# Altium PCB PUMP_MODULE_20230110.PcbDoc (part 5 of 6)
Units mm, origin at the board's own origin, x right, y up, seen from the top; angles counter-clockwise.
Board outline 260.15 x 142.01 mm, 4 copper layers (Top Layer, Mid-Layer 1, Mid-Layer 2, Bottom Layer); 422 components, 240 nets, 1746 pads, 416 vias.
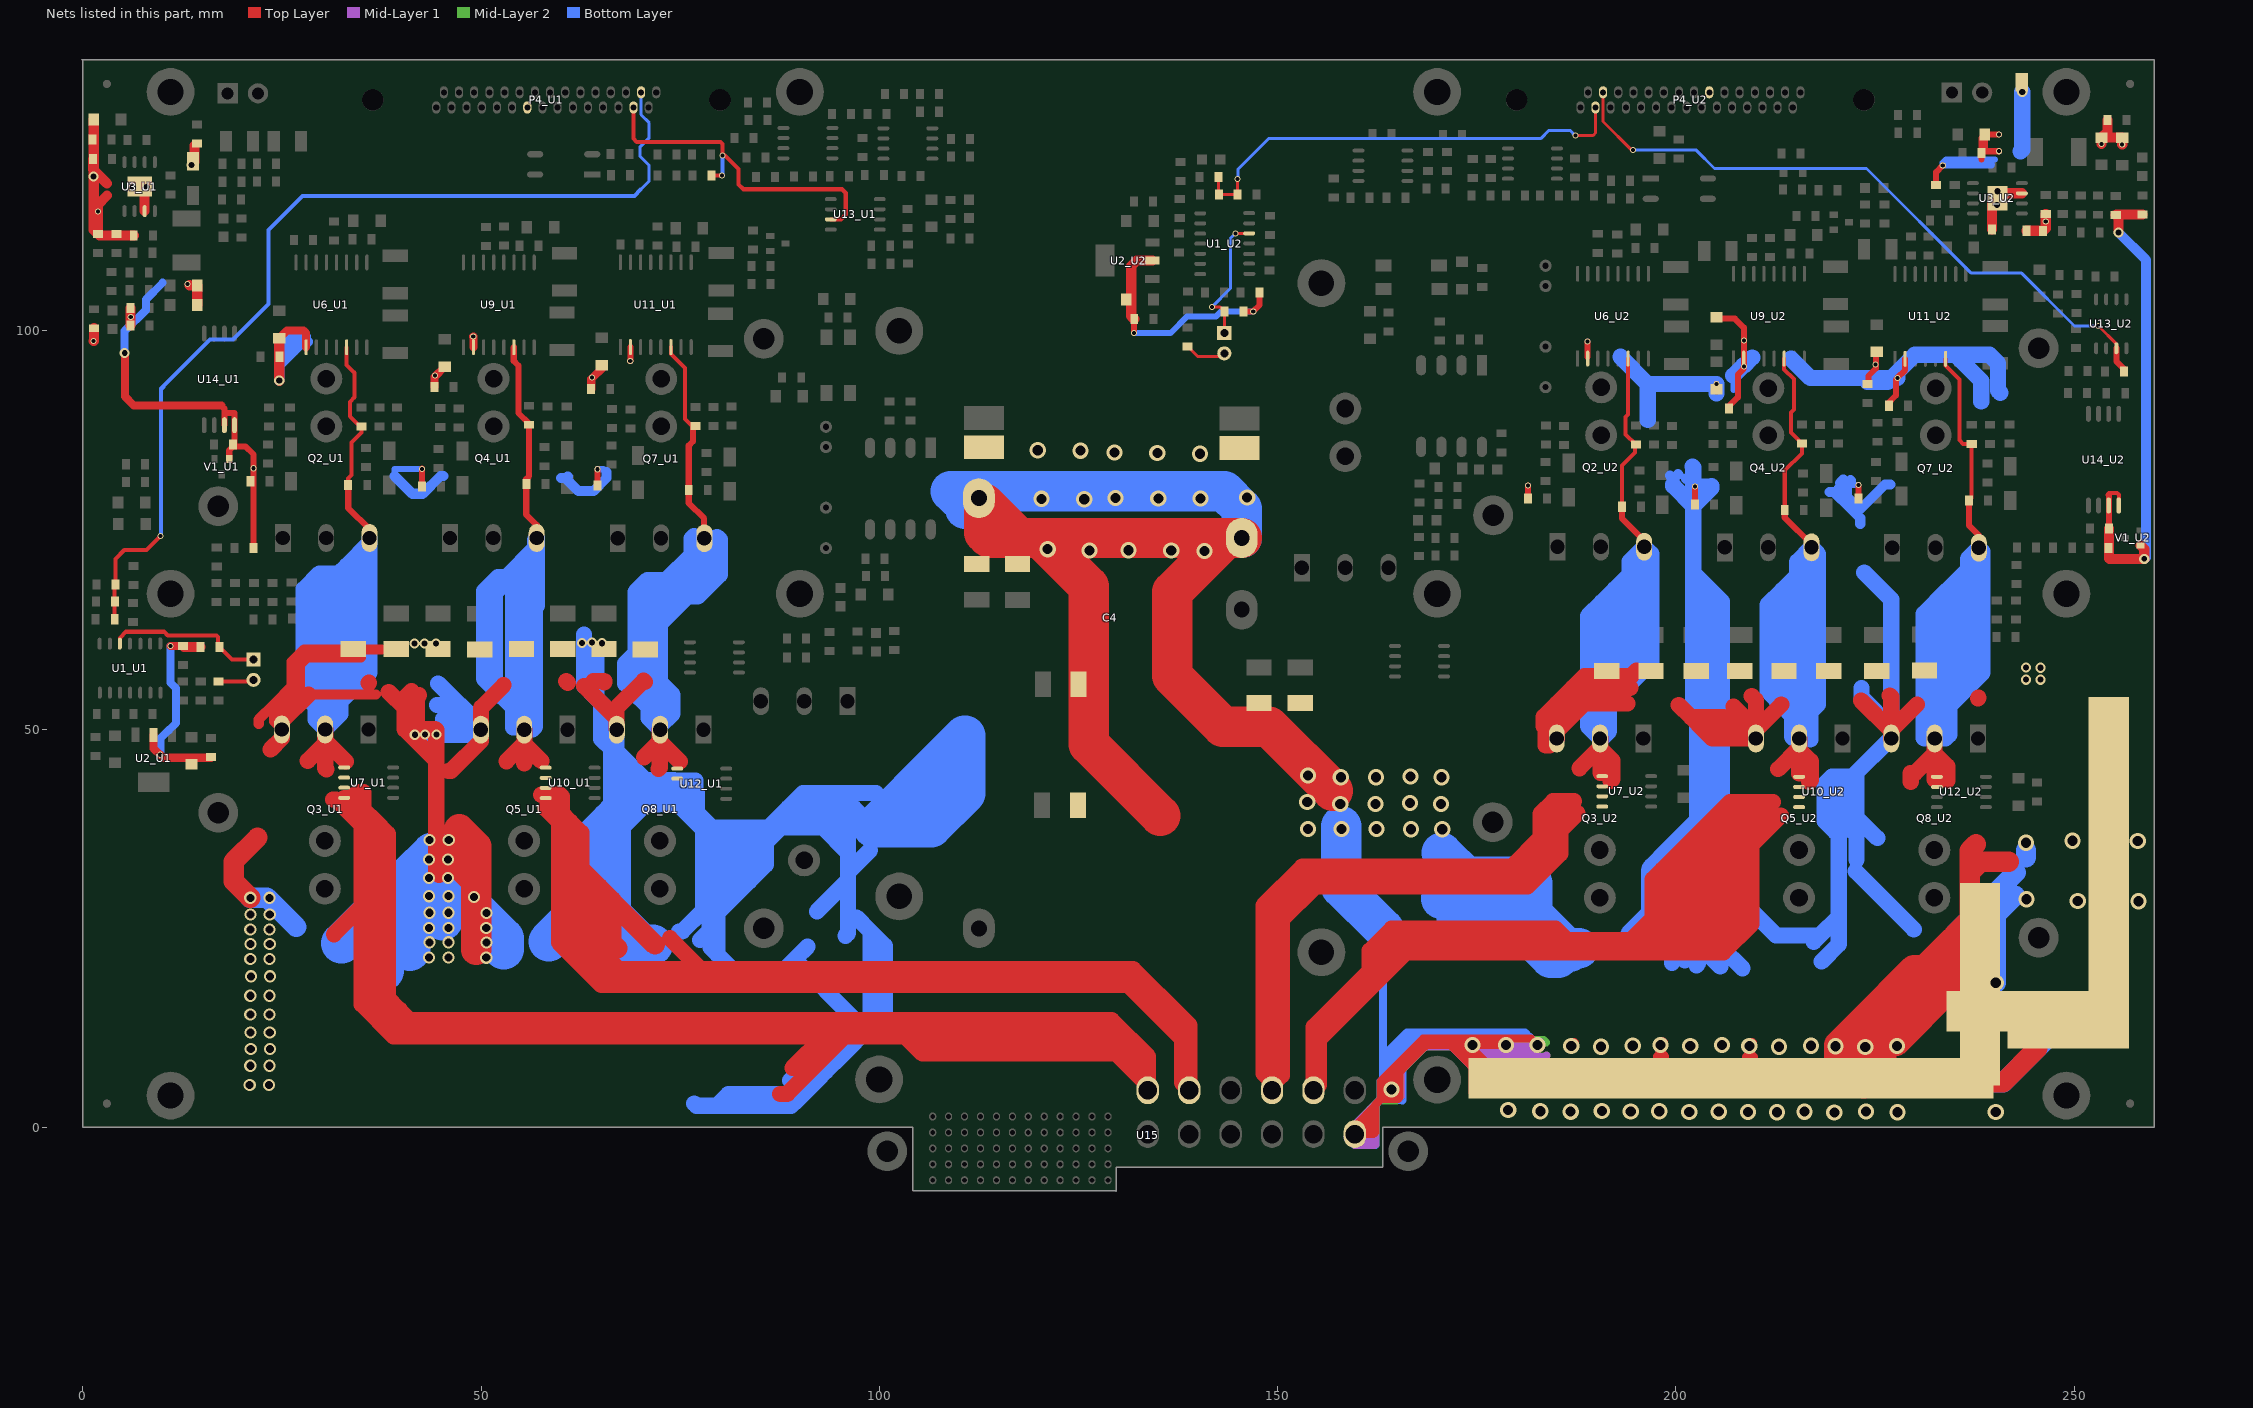
[diagram p7: the nets of this part, all layers, seen from the top]

## Via types
v1: diameter 0.762, hole 0.508, Top Layer to Bottom Layer, 208 vias
v2: diameter 2.032, hole 1.27, Top Layer to Bottom Layer, 78 vias
v3: diameter 1.27, hole 0.762, Top Layer to Bottom Layer, 61 vias
v4: diameter 1.524, hole 1.016, Top Layer to Bottom Layer, 53 vias
v5: diameter 1.27, hole 0.711, Top Layer to Bottom Layer, 16 vias

## Nets (pads, with @x,y where several pads share a name; then routed paths per layer and width w, separated by ;. In a path a pad name is that pad's centre, name@x,y a point inside that pad or via, vN(x,y) a via of type N, cw(c..) or ccw(c..) an arc to the next point about the centre after c; other vN are vias at no path point) (continued)
PGND: C4.2 C15_U1.1 C15_U2.1 C16_U1.1 C16_U2.1 C17.1 C18.1 C19_U1.2 C19_U2.2 C20_U1.1 C20_U2.1 C21_U1.2 C21_U2.2 C22_U1.2 C22_U2.2 C24_U1.2 C24_U2.2 C25_U1.1 C25_U2.1 C26_U1.1 C26_U2.1 C27_U1.1 C27_U2.1 C29_U1.1 C29_U2.1 C30_U1.1 C30_U2.1 C43_U1.2 C43_U2.2 C44_U1.2 C44_U2.2 C51_U1.2 C51_U2.2 C52_U1.2 C52_U2.2 C68_U1.2 C68_U2.2 C69_U1.1 C69_U2.1 C70_U1.1 C70_U2.1 C71_U1.1 C71_U2.1 C72_U1.1 C72_U2.1 C73.1 C74.1 C75.1 C76.1 C77_U1.1 C77_U2.1 C78_U1.1 C78_U2.1 D2_U1.1 D2_U2.1 pad.@186.665,6.172 pad.@210.414,6.172 pad.@227.203,6.172 pad.@238.176,17.958 pad.@244.145,14.58 pad.@249.276,12.446 pad.@254.356,24.765 pad.@254.356,41.326 Q3_U1.3 Q3_U2.3 Q5_U1.3 Q5_U2.3 Q8_U1.3 Q8_U2.3 R16_U1.2 R16_U2.2 R21_U1.2 R21_U2.2 R22_U1.1 R22_U2.1 R24_U1.2 R24_U2.2 R25_U1.1 R25_U2.1 R37_U1.1 R37_U2.1 R54_U1.1 R54_U2.1 R68_U1.1 R68_U2.1 R78_U1.2 R78_U2.2 U3_U1.7 U3_U1.9 U3_U2.7 U3_U2.9 U6_U1.2 U6_U2.2 U9_U1.2 U9_U2.2 U11_U1.2 U11_U2.2 U14_U1.3 U14_U1.4 U14_U2.3 U14_U2.4 U15.12 V1_U1.1 V1_U2.1 | length 2564
  Top Layer w0.508: C69_U2.1@254.305,72.72 C69_U2.1@254.33,72.746 ; U14_U2.3@254.33,78.08 254.33,79.375 254.229,79.477 254.381,79.629 255.397,79.629 255.6,79.426 U14_U2.4@255.6,78.08
  Top Layer w0.762: 17.399,90.627 17.78,90.246 17.78,89.433 ; U14_U1.3@17.78,88.163 17.78,89.433 ; V1_U1.1@18.39,83.896 18.39,84.988 C69_U1.1@18.898,85.496 ; R37_U1.1@21.057,81.128 R37_U1.1@21.438,80.747 ; R78_U1.2@21.438,72.746 R37_U1.1@21.438,80.747 ; 24.663,95.58 24.79,95.58 ; R54_U1.1@42.57,80.467 42.57,82.702 v1(42.596,82.677) ; v1(64.618,82.626) 64.618,82.677 64.643,82.652 R68_U1.1@64.643,80.569 ; v1(68.732,96.241) 68.758,96.266 U11_U1.2@68.758,97.968 ; R37_U2.1@181.407,78.943 v1(181.407,80.569) ; U6_U2.2@188.925,96.723 v1(188.925,98.654) ; R54_U2.1@202.387,78.181 v1(202.387,80.442) ; C43_U2.2@205.08,92.405 v1(205.08,93.32) ; C51_U2.2@205.08,101.702 205.232,101.549 207.391,101.549 208.534,100.406 v1(208.534,98.781) v1(208.534,95.529) 208.534,95.504 208.509,95.479 208.509,95.25 207.772,94.513 207.772,91.669 C44_U2.2@206.68,90.576 ; R68_U2.1@222.936,78.943 v1(222.936,80.67) ; C68_U2.2@224.18,93.751 224.18,94.361 225.12,95.301 C19_U2.2@225.12,97.358 ; C52_U2.2@226.644,90.907 227.635,91.897 227.635,93.904 v1(227.813,94.082) ; v1@227.8,94.094 228.778,95.072 U11_U2.2@228.778,96.495 ; R24_U2.2@232.664,118.313 232.664,119.939 v1(233.502,120.777) ; 238.379,121.539 C25_U2.1@238.379,122.352 ; v1(240.538,122.555) C25_U2.1@238.582,122.555 ; v1(240.538,124.638) C24_U2.2@238.785,124.638 ; 254.33,79.375 254.381,79.324 R78_U2.2@254.381,75.209 ; 17.78,89.433 18.059,89.713 19.025,89.713 19.05,89.687 U14_U1.4@19.05,88.163 19.05,85.649 C69_U1.1@18.898,85.496 ; C69_U1.1@18.898,85.496 20.422,85.496 21.438,84.48 R37_U1.1@21.438,80.747 ; C25_U2.1@238.379,122.352 C25_U2.1@238.582,122.555 ; C25_U2.1@238.379,122.352 238.379,124.231 C24_U2.2@238.785,124.638 ; C25_U2.1@238.582,122.555 238.785,122.758 C24_U2.2@238.785,124.638
  Top Layer w1.016: v5(5.258,97.231) 5.283,97.206 5.283,91.745 6.401,90.627 17.399,90.627 ; C43_U1.2@24.663,99.085 25.629,100.051 27.711,100.051 28.042,99.72 U6_U1.2@28.042,97.942 ; C44_U1.2@44.145,92.964 44.145,94.209 C51_U1.2@45.441,95.504 ; v1(49.022,99.314) 49.047,99.289 U9_U1.2@49.047,97.942 ; C52_U1.2@63.83,92.71 63.83,93.955 65.354,95.479 C19_U1.2@65.354,95.733 ; pad.@174.473,7.569 171.679,10.363 ; pad.@176.098,6.934 176.098,7.315 174.6,8.814 174.473,8.941 ; pad.@176.53,7.798 174.6,9.728 v2@174.473,9.855 ; v2@178.943,10.109 v2(178.689,10.363) v2(174.473,10.363) ; v2(182.626,10.363) 181.839,11.151 168.758,11.151 ; U15.12@159.741,-0.837 159.741,0.204 162.286,2.748 ; U15.12@159.741,-0.837 U15.12@160.934,-0.837 ; U15.12@159.741,-0.837 162.286,1.707 ; U15.12@160.934,-0.837 162.028,-0.837 162.286,-0.579 162.286,0.514 ; U15.12@160.934,-0.837 162.286,0.514 ; 162.286,0.514 162.286,1.707 ; 162.286,1.707 162.286,2.748 ; 162.286,2.748 162.286,2.894 162.973,3.581 ; 162.973,3.581 162.973,5.849 168.275,11.151 168.758,11.151 ; 162.973,3.581 163.373,3.981 163.373,5.766 164.313,6.706 ; 162.973,3.581 163.119,3.581 ; 163.119,3.581 165.1,3.581 165.303,3.785 165.303,6.96 ; 163.119,3.581 v2(164.313,4.775) 164.313,6.706 ; 164.313,6.706 165.303,7.696 ; 165.303,6.96 165.303,7.696 ; 165.303,6.96 168.707,10.363 ; 165.303,7.696 167.97,10.363 ; 167.97,10.363 168.707,10.363 ; 167.97,10.363 168.758,11.151 ; 168.707,10.363 171.679,10.363 ; 171.679,10.363 173.05,10.363 ; 173.05,10.363 174.473,8.941 ; 173.05,10.363 v2(174.473,10.363) ; 174.473,8.941 v2@174.473,9.855 ; v2@174.473,9.855 v2(174.473,10.363)
  Top Layer w1.27: C26_U1.1@1.295,121.59 1.295,120.244 1.372,120.167 ; v1(1.372,98.73) 1.422,98.781 R16_U1.2@1.422,100.33 ; C24_U1.2@1.372,126.517 1.372,120.167 ; 3.023,118.516 1.372,120.167 ; 3.048,116.992 1.93,115.875 v1(1.93,114.986) ; C29_U1.1@5.969,102.87 5.994,102.845 C30_U1.1@5.994,100.686 ; C27_U1.1@6.401,111.963 2.108,111.963 R22_U1.1@1.93,112.141 ; U3_U1.9@7.163,118.11 7.772,117.5 U3_U1.7@7.772,115.037 ; v1@13.411,105.74 13.437,105.715 C21_U1.2@14.376,105.715 C22_U1.2@14.376,103.251 ; D2_U1.1@14.046,121.209 C25_U1.1@14.046,123.292 ; 22.098,50.648 22.098,51.232 24.003,53.137 ; C43_U1.2@24.663,99.085 24.663,95.58 v3(24.663,93.751) v3@24.689,93.726 ; 34.95,59.03 28.296,59.03 28.27,59.055 27.28,58.064 27.28,55.194 26.416,54.331 ; 36.779,54.331 28.346,54.331 26.416,54.331 ; 37.49,60.02 27.788,60.02 26.238,58.471 26.238,55.372 24.003,53.137 ; 174.473,8.941 174.473,7.569 pad.@174.6,7.442 ; v2@174.6,9.728 174.6,8.814 pad.@174.6,7.442 ; v2(186.868,10.236) v2@187.198,10.566 ; 197.764,8.915 198.526,8.915 198.069,9.373 v2(198.069,10.338) v2@198.399,10.668 ; 208.915,8.814 209.677,8.814 209.22,9.271 v2(209.22,10.236) v2@209.55,10.566 ; 219.735,8.763 220.497,8.763 220.04,9.22 v2(220.04,10.185) v2@220.37,10.516 ; C26_U2.1@239.7,112.751 239.7,116.002 U3_U2.9@240.36,116.662 240.97,117.272 U3_U2.7@243.434,117.272 ; R22_U2.1@244.043,112.573 246.024,112.573 R25_U2.1@246.075,112.522 246.431,112.878 v1(246.431,113.716) C27_U2.1@246.431,114.681 ; v1(253.416,123.444) C21_U2.2@253.416,124.257 ; C30_U2.1@254.178,126.492 254.178,125.019 C21_U2.2@253.416,124.257 ; R78_U2.2@254.381,75.209 254.356,75.184 254.356,71.45 254.432,71.374 v5(258.801,71.374) 258.801,72.593 V1_U2.1@258.318,73.076 ; C29_U2.1@255.219,114.554 C29_U2.1@255.295,114.63 ; v5(255.575,112.344) 255.575,114.351 C29_U2.1@255.295,114.63 ; v1(256.032,123.419) C22_U2.2@256.032,124.231 256.007,124.257 C21_U2.2@253.416,124.257 ; R16_U2.2@258.572,114.63 C29_U2.1@255.295,114.63 ; 1.372,115.545 1.372,120.167 ; 1.372,115.545 1.372,112.7 R22_U1.1@1.93,112.141 ; 1.372,115.545 v1(1.93,114.986) ; R22_U1.1@1.93,112.141 v1(1.93,114.986) ; 24.003,52.019 24.003,50.997 25,50 25,50.984 Q3_U1.3@25,51.022 ; 24.003,52.019 Q3_U1.3@25,51.022 ; 24.003,52.019 24.003,53.137 ; Q3_U1.3@25,51.022 25,52.915 26.416,54.331 ; pad.@174.6,7.442 174.6,4.369 175.362,4.369 174.904,4.826 174.904,5.791 175.235,6.121 175.235,6.807 pad.@174.6,7.442
  Top Layer w2.032: 23.571,47.447 25,48.876 Q3_U1.3@25,50 ; Q3_U1.3@25,50.984 28.346,54.331 ; 35.88,55.794 35.916,55.829 ; 38.405,54.661 40.399,52.667 ; 41.275,54.788 40.399,53.911 40.399,52.667 ; 42.215,54.254 41.961,54 41.961,50 ; 44.729,31.725 44.374,32.08 44.374,46.025 ; 45.974,44.729 45.949,44.729 45.923,44.755 46.228,44.755 50,48.527 50,52.692 52.832,55.524 ; 60.706,56.007 60.88,55.833 ; 62.941,55.423 Q8_U1.3@67,51.364 ; 64.135,56.058 65.456,56.058 65.456,55.88 ; Q8_U1.3@67,50 Q8_U1.3@67,51.364 ; 70.561,55.931 70.409,56.083 67,52.674 Q8_U1.3@67,51.364 ; 189.255,53.213 188.493,53.213 ; 193.929,53.213 188.493,53.213 ; 194.259,55.194 187.046,55.194 ; 195.047,57.328 194.412,56.693 188.544,56.693 187.046,55.194 ; 200.355,53.035 201.905,51.486 ; 207.239,52.832 Q5_U2.3@210.041,50.029 ; 209.525,54.153 210.041,53.636 Q5_U2.3@210.041,50.029 ; 213.233,53.086 Q5_U2.3@210.041,49.894 ; 223.241,53.594 Q8_U2.3@227.041,49.793 ; 226.847,54.229 227.041,54.035 Q8_U2.3@227.041,49.876 ; Q8_U2.3@227.041,48.83 Q8_U2.3@227.041,49.793 ; 230.251,53.086 Q8_U2.3@227.041,49.876 ; 237.921,53.873 237.998,53.95 ; 40.399,50 44.374,46.025 ; 40.399,50 41.961,50 ; 40.399,50 40.399,52.667 ; 41.961,50 44.259,50 44.374,49.886 44.374,46.025 ; Q3_U2.3@185.041,49.761 185.041,51.234 ; Q3_U2.3@185.041,49.761 188.493,53.213 ; Q3_U2.3@185.041,49.761 Q3_U2.3@185.041,48.83 184.167,47.955 183.667,47.955 183.667,50.114 183.413,50.368 183.413,51.562 185.041,53.19 ; 185.041,51.234 185.041,53.19 ; 185.041,51.234 187.02,53.213 188.493,53.213 ; 185.041,53.19 187.046,55.194 ; 201.905,51.486 203.467,49.924 ; 201.905,51.486 205.969,51.486 207.531,49.924 ; 203.467,49.924 204.561,48.83 208.625,48.83 ; 203.467,49.924 207.531,49.924 ; 207.531,49.924 208.625,48.83 ; 208.625,48.83 Q5_U2.3@210.041,48.83 Q5_U2.3@210.041,49.894 ; Q5_U2.3@210.041,49.894 Q5_U2.3@210.041,50.029 ; Q8_U2.3@227.041,49.793 Q8_U2.3@227.041,49.876
  Top Layer w2.54: v4(21.031,28.829) 18.948,30.912 18.948,33.401 21.946,36.398 ; pad.@227.559,5.639 241.071,5.639 pad.@245.364,9.931 ; v2(227.762,10.211) 234.772,17.221 234.772,21.641 ; 234.772,23.19 234.772,24.079 236.88,26.187 236.88,31.953 ; 237.668,35.56 236.88,34.773 236.88,31.953 ; 241.833,33.35 238.277,33.35 236.88,31.953
  Top Layer w3.81: 45.491,34.849 45.542,34.849 49.403,30.988 ; 47.269,37.44 49.403,35.306 49.403,30.988 ; 49.403,22.276 49.403,30.988 ; pad.@223.571,5.512 v2@223.571,10.439 ; pad.@225.806,7.772 225.806,12.675 ; 234.772,21.641 225.806,12.675 ; 234.772,23.19 231.343,19.761 229.921,19.761 223.571,13.411 ; v2@223.571,10.439 221.894,8.763 220.497,8.763 220.497,10.338 223.571,13.411 ; v2@223.571,10.439 225.806,12.675 ; v2@223.571,10.439 223.571,13.411
  Top Layer w5.08: 117.5,74 113.182,78.318 113.182,74.651 113.833,74 C4.2@143.545,74 ; 120.208,74 126.289,67.92 126.289,48.133 135.28,39.141 ; C4.2@145.5,74 C4.2@143.545,74 ; 156.947,42.291 148.92,50.317 143.129,50.317 136.754,56.693 136.754,67.234 136.779,67.234 C4.2@143.545,74
  Mid-Layer 1 w1.016: U15.12@158.775,-1.27 159.69,-2.184 162.179,-2.184 162.286,-2.078 162.286,-0.833 ; U15.12@159.7,-0.837 160.438,-1.575 161.544,-1.575 162.286,-0.833 ; 165.456,6.807 165.456,5.105 ; 168.834,10.185 171.806,10.185 170.891,11.1 ; 172.06,10.185 173.304,10.185 174.676,8.814 183.54,8.814 183.744,9.017 ; U15.12@159.741,-0.837 159.741,0.349 162.286,2.894 ; U15.12@159.741,-0.837 162.286,1.707 ; U15.12@159.741,-0.837 160.935,-0.837 162.286,0.513 ; 162.286,-0.833 162.286,0.513 ; 162.286,0.513 162.286,1.707 ; 162.286,1.707 162.286,2.894 ; 162.286,2.894 162.944,3.553 ; 162.944,3.553 162.944,5.82 163.551,6.426 ; 162.944,3.553 v2@163.551,4.159 ; 162.944,3.553 163.551,3.553 ; 163.551,3.553 164.385,3.553 ; 163.551,3.553 v2@163.551,4.159 ; v2@163.551,4.159 163.551,6.426 ; v2@163.551,4.159 164.167,4.775 v2(164.313,4.775) ; 163.551,6.426 168.224,11.1 168.732,11.1 ; v2(164.313,4.775) 165.125,4.775 165.456,5.105 ; v2(164.313,4.775) v2@164.313,5.258 ; v2(164.313,4.775) 164.313,3.734 164.44,3.607 164.385,3.553 ; v2@164.313,5.258 164.313,6.68 164.821,7.188 ; v2@164.313,5.258 164.821,5.766 164.821,7.188 ; 164.385,3.553 165.147,3.553 165.456,3.861 165.456,5.105 ; 164.821,7.188 168.732,11.1 ; 168.732,11.1 170.891,11.1 ; 170.891,11.1 181.889,11.1 v2(182.626,10.363) ; v2(182.626,10.363) 181.635,9.373 175.463,9.373 v2(174.473,10.363) v2(178.689,10.363) v2(182.626,10.363) ; 165.456,7.112 168.529,10.185 168.072,10.185 165.456,7.569 165.456,7.112
  Mid-Layer 1 w1.27: 172.06,10.185 175.362,6.883 175.362,6.248
  Mid-Layer 2 w1.016: U15.12@158.877,-1.372 159.664,-2.159 162.23,-2.159 162.286,-2.103 162.286,-0.859 ; U15.12@159.7,-0.837 159.7,0.308 162.286,2.894 ; 162.806,3.414 163.347,3.414 ; 162.966,3.574 162.966,5.766 163.5,6.299 ; 165.405,6.7 165.405,3.962 165.049,3.607 ; 168.865,10.16 171.958,10.16 ; 175.158,5.385 175.158,6.96 171.958,10.16 ; 183.617,8.915 174.473,8.915 173.228,10.16 171.958,10.16 ; 183.718,10.643 183.388,10.973 171.145,10.973 ; U15.12@159.741,-0.837 159.741,0.255 162.286,2.799 ; U15.12@159.741,-0.837 U15.12@159.818,-0.914 ; U15.12@159.741,-0.837 159.996,-0.837 162.286,1.453 ; U15.12@159.818,-0.914 160.098,-1.194 161.95,-1.194 162.286,-0.859 ; U15.12@159.818,-0.914 161.315,-0.914 162.286,0.056 ; 162.286,-0.859 162.286,0.056 ; 162.286,0.056 162.286,1.453 ; 162.286,1.453 162.286,2.799 ; 162.286,2.799 162.286,2.894 ; 162.286,2.894 163.5,4.108 ; 163.347,3.414 164.338,3.414 ; 163.347,3.414 163.5,3.567 163.5,4.108 ; 163.5,4.108 163.5,6.299 ; 163.5,4.108 164.167,4.775 v2(164.313,4.775) ; 163.5,6.299 164.313,7.112 ; v2(164.313,4.775) v2@164.313,5.613 ; v2(164.313,4.775) 165.024,4.775 165.049,4.801 165.049,3.607 ; v2(164.313,4.775) 164.338,4.75 164.338,3.414 ; v2@164.313,5.613 164.313,7.112 ; v2@164.313,5.613 164.795,6.096 164.795,7.595 ; 164.313,7.112 164.795,7.595 ; 164.338,3.414 164.857,3.414 165.049,3.607 ; 164.795,7.595 168.173,10.973 171.145,10.973 ; 171.145,10.973 171.958,10.16 ; 165.405,7.061 168.504,10.16 168.097,10.16 165.405,7.468 165.405,7.061 ; v2@174.473,10.008 174.777,9.703 181.966,9.703 v2(182.626,10.363) v2(178.689,10.363) v2(174.473,10.363) v2@174.473,10.008
  Bottom Layer w0.762: 39.167,81.763 39.167,82.652 39.192,82.677 v1(42.596,82.677) ; v1(64.618,82.626) 65.38,82.626 65.761,82.245 ; 207.239,92.583 207.239,94.234 v1(208.534,95.529) 208.483,95.58 v1@208.432,95.631 ; 221.488,80.594 221.564,80.67 v1(222.936,80.67) ; 239.7,120.879 239.598,120.777 v1(233.502,120.777) 233.502,121.107 233.934,121.539 240.03,121.539
  Bottom Layer w1.016: v5(5.258,97.231) 5.258,99.974 7.925,102.641 7.925,103.937 10.033,106.045 ; U15.12@158.902,-1.422 159.664,-2.184 161.047,-2.184 ; U15.12@159.284,-0.837 U15.12@159.7,-0.837 161.047,-2.184 ; 163.525,20.676 163.22,20.371 163.22,8.915 ; v2@163.805,4.191 163.779,4.216 v2@163.779,4.387 ; 175.387,8.128 174.473,9.042 ; U15.12@159.741,-0.837 159.741,0.28 161.011,1.549 ; U15.12@159.741,-0.837 160.479,-1.575 161.798,-1.575 162.286,-1.087 ; U15.12@159.741,-0.837 161.011,0.432 161.011,1.549 ; U15.12@159.741,-0.837 U15.12@160.529,-0.837 ; U15.12@160.529,-0.837 161.977,-0.837 162.286,-0.528 ; U15.12@160.529,-0.837 161.62,0.254 161.62,2.159 ; 161.011,1.549 161.62,2.159 ; 161.047,-2.184 162.286,-2.184 162.286,-1.087 ; 161.62,2.159 161.62,2.228 162.286,2.894 ; 162.286,-1.087 162.286,-0.528 ; 162.286,-0.528 162.286,2.894 ; 162.286,2.894 162.881,3.489 ; 162.881,3.489 163.068,3.676 ; 162.881,3.489 162.941,3.429 164.135,3.429 ; 163.068,3.676 v2@163.779,4.387 ; 163.068,3.676 163.068,4.623 163.22,4.775 ; 163.22,4.775 163.22,8.915 ; 163.22,4.775 v2@163.779,4.775 ; 163.22,8.915 166.243,11.938 167.335,11.938 ; v2@163.779,4.387 v2@163.779,4.775 ; v2@163.779,4.387 v2@164.167,4.775 ; v2@163.779,4.775 163.779,8.357 164.313,7.823 ; v2@163.779,4.775 v2@164.167,4.775 ; 164.135,3.429 165.151,3.429 ; 164.135,3.429 164.313,3.607 v2(164.313,4.775) ; v2@164.167,4.775 v2(164.313,4.775) ; v2(164.313,4.775) 164.313,7.671 ; v2(164.313,4.775) 165.075,4.775 v2@165.151,4.699 ; 164.313,7.671 167.475,10.833 ; 164.313,7.671 164.313,7.823 ; 164.313,7.823 164.313,8.915 167.335,11.938 ; 165.151,3.429 165.644,3.429 165.659,3.414 165.659,7.315 168.631,10.287 ; 165.151,3.429 v2@165.151,4.699 ; v2@165.151,4.699 165.151,7.214 168.224,10.287 168.631,10.287 ; 167.335,11.938 181.051,11.938 181.661,11.328 ; 167.475,10.833 171.59,10.833 ; 167.475,10.833 167.97,11.328 171.094,11.328 ; 168.631,10.287 172.136,10.287 ; 171.094,11.328 181.661,11.328 ; 171.094,11.328 171.59,10.833 ; 171.59,10.833 174.003,10.833 v2(174.473,10.363) ; 171.59,10.833 172.136,10.287 ; 172.136,10.287 172.136,9.957 174.473,7.62 174.473,9.042 ; 172.136,10.287 173.228,10.287 174.473,9.042 ; 174.473,9.042 v2(174.473,10.363) ; v2(174.473,10.363) v2(178.689,10.363) v2(182.626,10.363) 181.661,11.328
  Bottom Layer w1.27: v3(24.663,93.751) 24.663,95.682 ; 24.714,96.749 24.714,96.977 ; 27.991,99.289 26.035,99.289 24.714,97.968 24.714,96.977 ; 28.296,98.628 27.61,98.628 ; 39.167,81.763 41.377,79.553 42.672,79.553 44.907,81.788 45.288,81.788 ; 60.071,81.534 60.579,81.534 62.23,79.883 64.11,79.883 65.761,81.534 65.761,82.245 ; 60.808,81.636 60.884,81.712 ; 199.238,81.839 199.593,81.483 ; 200.279,82.017 200.33,81.966 ; 201.295,81.432 201.524,81.661 ; 219.278,79.756 219.888,79.756 221.945,77.699 ; 220.421,80.188 220.472,80.188 221.488,79.172 ; 220.624,80.924 221.005,81.305 221.158,81.153 ; 221.488,80.594 221.488,79.172 ; 221.92,81.255 221.983,81.191 ; 223.139,75.794 223.139,76.505 221.945,77.699 ; 226.924,80.721 226.263,80.721 223.495,77.953 ; v5(255.575,112.344) 259.007,108.912 259.007,71.58 v5(258.801,71.374) ; 24.663,95.682 27.61,98.628 ; 24.663,95.682 24.663,96.926 24.714,96.977 ; 24.714,96.977 26.365,98.628 27.61,98.628 ; 221.488,79.172 222.707,77.953 223.495,77.953 ; 221.945,77.699 223.241,77.699 223.495,77.953
  Bottom Layer w2.032: v3(41.681,49.301) 49.343,49.301 Q5_U1.3@49.978,49.936 Q5_U1.3@49.978,50.352 ; 44.45,53.035 47.295,53.035 ; 44.602,55.728 47.295,53.035 ; 45.263,51.257 45.339,51.181 Q5_U1.3@49.149,51.181 ; 62.941,61.9 62.941,55.448 64.491,53.899 ; 64.491,60.071 64.491,53.899 ; 66.281,38.367 66.319,38.405 ; Q8_U1.3@67,50 Q8_U1.3@67,49.271 ; 70.002,42.088 68.758,43.332 68.758,45.466 ; 74.854,24.613 75.26,24.613 77.88,27.232 77.88,30.705 ; 76.759,3.023 77.064,2.718 88.925,2.718 89.357,3.15 ; 77.47,23.52 78.664,24.714 78.664,25.883 ; 78.791,22.606 79.654,21.742 ; 79.172,32.741 80.874,32.741 ; 90.983,22.708 89.624,21.349 ; 91.999,12.116 92.316,11.798 92.316,8.585 ; 92.177,27.127 96.063,31.013 ; 95.656,12.649 93.294,10.287 93.294,8.585 ; 95.733,24.054 96.063,24.384 96.063,31.013 ; 97.13,26.365 98.882,24.613 ; 98.831,34.798 96.063,32.029 ; 99.568,41.986 90.424,41.986 88.57,40.132 ; 193.04,96.749 196.469,93.32 ; 196.469,88.824 196.469,93.32 ; 199.492,20.625 199.492,34.163 199.492,34.493 200.177,35.179 ; 199.644,80.721 199.644,80.543 202.184,78.003 ; 201.117,20.98 200.965,21.133 200.965,33.172 202.006,34.214 203.606,34.214 204.546,35.154 ; 202.082,82.956 202.184,82.855 202.184,78.003 ; v1(202.387,80.442) 204.394,80.442 204.47,80.518 204.47,80.289 202.184,78.003 ; 202.59,20.371 202.794,20.574 202.794,32.283 204.546,34.036 ; 205.08,92.126 v1(205.08,93.32) 196.469,93.32 ; 205.562,20.193 204.546,21.209 204.546,34.036 ; 207.188,94.386 v1@208.432,95.631 ; 208.356,19.99 205.765,22.581 205.765,28.524 205.765,32.868 205.765,35.255 ; v1@208.483,95.58 209.575,96.672 ; 209.55,27.127 212.585,24.092 218.072,24.092 ; Q5_U2.3@210.041,48.83 205.765,53.106 ; 214.452,96.52 216.891,94.082 227.076,94.082 ; 217.297,23.317 218.072,24.092 ; 218.288,20.828 220.447,22.987 220.447,26.467 ; 222.199,37.135 220.002,39.332 ; 222.58,32.156 229.87,24.867 ; 222.656,33.604 222.656,38.964 ; 222.656,36.805 220.921,38.54 220.921,42.791 ; 223.317,55.169 223.317,53.975 Q8_U2.3@227.041,50.25 ; 223.647,69.672 227.041,66.278 Q8_U2.3@227.041,50.25 ; 224.053,93.599 226.593,93.599 227.076,94.082 ; 225.298,36.322 222.656,38.964 ; Q8_U2.3@226.644,48.514 222.656,44.526 ; Q8_U2.3@227.041,48.83 Q8_U2.3@227.041,50.25 ; 238.328,91.135 238.328,93.726 235.052,97.003 ; 240.716,92.227 240.436,92.507 240.436,95.936 239.37,97.003 235.052,97.003 ; 243.281,122.555 243.484,122.758 v3(243.484,129.997) ; 47.295,53.035 47.396,53.035 Q5_U1.3@49.251,51.181 ; 47.295,53.035 Q5_U1.3@49.149,51.181 ; Q5_U1.3@49.149,51.181 Q5_U1.3@49.978,50.352 ; Q5_U1.3@49.149,51.181 Q5_U1.3@49.251,51.181 ; Q5_U1.3@49.251,51.181 Q5_U1.3@49.978,50.453 ; Q5_U1.3@49.251,51.181 49.454,51.181 49.978,50.656 Q5_U1.3@49.978,50.453 ; Q5_U1.3@49.978,50.352 Q5_U1.3@49.978,50.453 ; 64.491,53.899 65.075,53.315 ; 65.075,53.315 65.075,48.768 66.319,47.523 ; 65.075,53.315 66.319,52.07 Q8_U1.3@66.319,48.59 ; 66.319,38.405 66.319,47.523 ; 66.319,38.405 67,39.085 67,47.224 ; 66.319,47.523 66.619,47.224 67,47.224 ; 66.319,47.523 Q8_U1.3@66.319,48.59 ; Q8_U1.3@66.319,48.59 Q8_U1.3@67,49.271 ; 67,47.224 Q8_U1.3@67,49.271 ; 67,47.224 68.758,45.466 ; 68.758,45.466 72.136,42.088 73.177,42.088 ; 73.177,42.088 74.651,43.561 76.937,43.561 76.937,42.215 77.114,42.037 77.114,39.522 77.88,38.757 ; 73.177,42.088 77.88,37.385 ; 77.88,30.705 78.664,29.921 ; 77.88,30.705 77.88,36.09 ; 77.88,36.09 77.88,37.385 ; 77.88,36.09 80.874,33.096 ; 77.88,37.385 77.88,38.757 ; 77.88,37.385 78.163,37.668 78.969,37.668 ; 77.88,38.757 78.969,37.668 ; 78.664,25.883 79.654,26.873 ; 78.664,25.883 78.664,29.921 ; 78.664,29.921 79.654,28.931 ; 78.969,37.668 80.874,35.763 ; 78.969,37.668 86.106,37.668 ; 79.654,21.742 81.737,19.66 87.935,19.66 89.624,21.349 ; 79.654,21.742 79.654,26.873 ; 79.654,26.873 83.668,30.886 ; 79.654,26.873 79.654,27.991 ; 79.654,27.991 79.654,28.931 ; 79.654,27.991 80.874,29.21 80.874,30.886 ; 79.654,28.931 79.654,31.267 80.874,32.487 ; 80.874,30.886 82.728,32.741 ; 80.874,30.886 80.874,32.41 ; 80.874,30.886 83.668,30.886 ; 80.874,32.41 80.874,32.487 ; 80.874,32.41 81.204,32.741 ; 80.874,32.487 80.874,32.741 ; 80.874,32.741 80.874,33.096 ; 80.874,32.741 81.204,32.741 ; 80.874,33.096 80.874,35.763 ; 80.874,35.763 84.226,35.763 ; 81.204,32.741 84.226,35.763 ; 81.204,32.741 82.728,32.741 ; 82.728,32.741 85.75,35.763 ; 83.668,30.886 85.75,32.969 85.75,35.763 ; 84.226,35.763 85.75,35.763 ; 85.75,35.763 87.655,37.668 ; 86.106,37.668 87.655,37.668 ; 86.106,37.668 87.592,39.154 ; 87.592,39.154 97.777,39.154 ; 87.592,39.154 88.57,40.132 ; 87.655,37.668 92.913,37.668 ; 88.57,40.132 96.799,40.132 97.777,39.154 ; 89.357,3.15 89.408,3.15 92.316,6.058 ; 89.357,3.15 80.01,3.15 81.026,4.166 89.357,4.166 ; 89.357,3.15 89.357,4.166 ; 89.357,4.166 89.357,5.334 88.798,5.893 91.491,8.585 92.316,8.585 ; 89.624,21.349 89.624,20.841 96.799,13.665 96.799,11.024 95.25,9.474 ; 92.316,6.058 93.294,7.036 ; 92.316,6.058 92.316,8.585 ; 92.316,8.585 93.294,8.585 ; 92.913,37.668 96.063,34.519 ; 92.913,37.668 96.215,37.668 ; 93.294,7.036 93.294,8.585 ; 93.294,7.036 95.25,8.992 ; 93.294,8.585 94.361,8.585 95.25,9.474 ; 95.25,8.992 95.25,9.474 ; 95.25,8.992 98.882,12.624 ; 96.063,31.013 96.063,32.029 ; 96.063,32.029 96.063,34.519 ; 96.063,34.519 96.063,37.516 96.215,37.668 ; 96.215,37.668 99.212,37.668 99.238,37.694 97.777,39.154 ; 98.882,12.624 100.686,14.427 100.686,22.809 98.882,24.613 ; 98.882,12.624 98.882,24.613 ; 200.177,35.179 202.641,37.643 ; 200.177,35.179 200.508,35.179 201.854,35.179 202.641,35.966 202.641,37.313 202.641,37.643 ; 202.184,69.621 202.184,78.003 ; 202.184,69.621 202.184,53.365 202.641,52.908 202.641,37.643 ; 202.184,69.621 203.53,68.275 ; 203.53,55.143 203.53,53.772 204.546,52.756 204.546,39.218 204.546,35.154 ; 203.53,55.143 203.53,68.275 ; 203.53,55.143 205.765,52.908 ; 203.53,68.275 204.8,67.005 ; 204.546,34.036 204.572,34.061 205.765,35.255 ; 204.546,34.036 204.546,34.087 204.546,35.154 ; 204.8,67.005 205.765,66.04 205.765,55.169 ; 204.8,67.005 204.8,56.134 205.765,55.169 ; 205.765,35.255 205.765,52.908 ; 205.765,52.908 205.765,53.106 ; 205.765,53.106 205.765,55.169 ; 218.072,24.092 220.447,26.467 ; 218.643,40.513 218.643,43.104 219.608,44.069 222.199,44.069 ; 218.643,40.513 220.002,41.872 ; 218.643,40.513 218.643,38.481 220.002,37.122 ; 220.002,37.122 220.002,39.332 ; 220.002,37.122 220.447,36.678 220.447,26.467 ; 220.002,39.332 220.002,41.872 ; 220.002,41.872 220.921,42.791 ; 220.921,42.791 222.199,44.069 ; 222.199,44.069 222.656,44.526 ; 222.656,38.964 222.656,44.526 ; 227.076,94.082 227.813,94.818 ; 227.076,94.082 v1(227.813,94.082) 227.813,94.818 ; 227.813,94.818 229.997,97.003 235.052,97.003
  Bottom Layer w2.54: v4(21.031,28.829) 23.139,28.829 26.797,25.171 ; 227.559,5.639 241.097,5.639 246.151,10.693 ; 235.102,24.435 239.065,28.397 ; 237.033,22.936 239.065,24.968 239.065,28.397 ; v2(240.157,18.161) 240.157,26.695 ; 242.57,29.108 240.157,26.695 ; 242.672,32.004 240.157,29.489 ; 243.967,33.884 v2@243.967,34.798 ; 239.065,28.397 240.157,29.489 ; 240.157,26.695 240.157,29.489
  Bottom Layer w3.81: 194.894,24.003 197.51,26.619 197.51,32.182 199.492,34.163 200.508,35.179 201.295,35.966 ; 202.641,35.966 201.295,35.966 ; 204.546,39.802 204.546,39.218 202.641,37.313 201.295,35.966
  Bottom Layer w5.08: 32.436,23.114 32.487,23.114 37.414,28.042 ; 37.77,19.685 37.77,19.736 37.414,20.091 37.414,28.042 ; 41.021,22.174 41.084,22.238 41.084,31.712 ; 45.212,26.01 44.882,26.34 44.882,28.88 ; v4(45.872,33.655) v4(45.872,31.318) 45.872,30.734 48.527,28.08 ; 52.857,22.352 52.857,23.749 48.527,28.08 ; 58.471,23.343 63.424,28.296 63.424,32.728 ; 67,39.085 70.002,42.088 72.136,42.088 ; 70.307,20.498 66.281,24.524 66.281,26.784 ; 71.552,22.962 70.104,22.962 66.281,26.784 ; 73.177,42.088 74.092,42.088 ; C4.2@110.769,77.673 C4.2@112.096,79 ; C4.2@112.5,79 C4.2@112.237,79 ; C4.2@145.5,74 145.5,77.664 143.281,79.883 108.991,79.883 109.874,79 C4.2@112.096,79 ; v2@158.013,37.821 158.013,30.175 163.322,24.867 ; 170.51,28.753 170.548,28.715 176.365,28.715 ; 170.612,34.468 173.634,31.445 ; 172.491,25.806 173.66,26.975 178.105,26.975 ; 180.95,27.788 186.69,22.047 ; 185.242,21.311 184.302,21.311 180.81,24.803 ; 187.681,22.504 187.782,22.504 ; 202.641,35.966 203.759,37.084 ; 204.546,34.087 204.572,34.061 205.765,32.868 ; 205.765,28.524 206.019,28.778 ; 37.414,28.042 41.084,31.712 ; 41.084,31.712 43.866,34.493 44.882,34.493 44.882,28.88 ; 44.882,28.88 45.682,28.08 48.527,28.08 ; 63.424,32.728 64.211,32.728 ; 63.424,32.728 63.424,35.509 64.211,36.297 ; 64.211,28.08 66.281,30.15 ; 64.211,28.08 64.211,32.728 ; 64.211,28.08 64.986,28.08 66.281,26.784 ; 64.211,32.728 66.281,30.658 ; 64.211,32.728 64.211,36.297 ; 64.211,32.728 66.281,34.798 ; 64.211,36.297 66.281,38.367 66.281,34.798 ; 66.281,26.784 66.281,30.15 ; 66.281,30.15 66.281,30.658 ; 66.281,30.658 66.281,34.798 ; 103.403,37.694 99.238,37.694 108.001,46.457 ; 103.403,37.694 106.528,37.694 110.769,41.935 ; 103.403,37.694 108.001,42.291 108.001,44.704 ; 108.001,44.704 108.001,46.457 ; 108.001,44.704 110.769,41.935 ; 108.001,46.457 110.693,49.149 110.769,49.149 110.769,41.935 ; C4.2@112.096,79 C4.2@112.237,79 ; C4.2@112.096,79 112.166,79.07 C4.2@112.237,79 ; 173.634,31.445 181.127,31.445 181.94,30.632 181.94,25.933 180.81,24.803 ; 173.634,31.445 176.365,28.715 ; 176.365,28.715 178.105,26.975 ; 178.105,26.975 178.638,26.975 180.81,24.803
  other v1: 21.438,82.753 63.932,94.132 44.221,94.386 225.069,95.783 6.02,101.752 13.157,105.867
  other v2: 219.888,1.88 212.674,1.905 227.813,1.905 201.676,1.93 209.067,1.93 240.157,1.956 186.792,1.981 205.384,1.981 216.154,1.981 194.335,2.007 223.876,2.007 182.982,2.032 197.917,2.032 190.703,2.057 178.943,2.184 223.774,10.084 190.602,10.135 212.954,10.135 201.803,10.236 194.589,10.262 216.941,10.262 205.791,10.363 258.064,28.397 250.444,28.423 244.018,28.651 243.942,35.738 257.988,35.966 249.784,35.992 166.751,37.44 170.663,37.44 153.797,37.465 158.039,37.465 162.433,37.465 157.861,40.615 162.281,40.615 170.51,40.615 166.624,40.716 153.721,40.843 157.937,43.967 162.357,43.967 170.586,43.967 166.7,44.069 153.797,44.196 140.818,72.365 136.652,72.415 126.365,72.441 131.293,72.466 121.133,72.593 125.73,78.867 120.371,78.918 140.31,78.943 135.026,78.969 129.667,79.019 146.177,79.07 140.259,84.582 134.899,84.684 129.54,84.734 125.247,84.963 119.888,85.014
  other v3: 42.951,49.327 44.399,49.327 243.942,56.21 245.796,56.21 245.796,57.709 243.967,57.734 41.631,60.731 42.901,60.757 44.348,60.757 65.202,60.782 62.662,60.833 63.906,60.884 240.335,115.824 240.36,117.526 6.274,118.008 8.026,118.085 1.346,119.38 13.665,120.802
  other v4: 20.955,5.309 23.368,5.309 21.031,7.747 23.444,7.747 21.082,9.83 23.495,9.83 21.057,11.913 23.47,11.913 21.031,14.199 23.444,14.199 21.031,16.535 23.444,16.535 21.107,18.974 23.52,18.974 21.031,21.133 23.444,21.133 50.648,21.311 43.485,21.336 45.898,21.336 21.057,23.038 23.47,23.038 50.673,23.216 43.51,23.241 45.923,23.241 21.031,24.841 23.444,24.841 50.648,25.019 43.485,25.044 45.898,25.044 21.057,26.746 23.47,26.746 50.673,26.924 43.51,26.949 45.923,26.949 23.444,28.829 49.124,28.931 43.485,29.032 45.898,29.032 43.459,31.318 43.459,33.655 43.536,36.093 45.949,36.093
PT1000_AN1_U1: P1_U1.2 R11_U1.1 | length 4.5
  Top Layer w0.508: R11_U1.1@17.018,55.982 20.93,55.982 21.133,56.185 P1_U1.2@21.438,56.185
PT1000_AN1_U2: P1_U2.2 R11_U2.1 | length 5.3
  Top Layer w0.381: R11_U2.1@138.709,98.044 139.954,96.799 142.926,96.799 P1_U2.2@143.307,97.18
PT1000_AP1_U1: P1_U1.1 R4_U1.2 U1_U1.12 | length 19.9
  Top Layer w0.508: U1_U1.12@4.648,60.731 4.648,61.432 5.446,62.23 10.058,62.23 10.211,62.23 10.668,61.773 16.789,61.773 16.967,61.595 16.967,60.503 R4_U1.2@17.145,60.325 18.745,58.725 P1_U1.1@21.438,58.725
PT1000_AP1_U2: P1_U2.1 R4_U2.2 U1_U2.12 | length 16.8
  Top Layer w0.381: v1(141.745,102.984) 142.786,102.984 R4_U2.2@143.332,102.438 143.332,99.746 P1_U2.1@143.307,99.72 ; v1(144.704,112.243) U1_U2.12@146.431,112.243
  Bottom Layer w0.381: v1(141.745,102.984) 144.094,105.334 144.094,111.633 v1(144.704,112.243)
TEMP_U1: C12_U1.1 P4_U1.29 R5_U1.2 R9_U1.2 | length 124
  Top Layer w0.508: R5_U1.2@3.962,63.5 C12_U1.1@3.962,68.402 ; C12_U1.1@4.089,68.174 4.089,71.374 5.207,72.492 8.001,72.492 v1(9.754,74.244)
  Bottom Layer w0.381: 70.028,117.729 71.107,118.808 71.107,120.764 69.977,121.895 69.977,123.114 71.107,124.244 71.107,126.124 70.092,127.139 P4_U1.29@70.091,129.952
  Bottom Layer w0.508: v1@9.804,74.244 9.804,92.634 ; 10.135,92.964 9.804,92.634 ; 70.028,117.729 69.24,116.942 27.584,116.942 23.317,112.674 23.317,103.378 18.872,98.933 15.951,98.933 9.804,92.786 9.804,92.634
TEMP_U2: C12_U2.1 P4_U2.29 R5_U2.2 R9_U2.2 | length 58.3
  Top Layer w0.381: C12_U2.1@142.596,119.329 142.596,117.17 R9_U2.2@142.646,117.119 R5_U2.2@144.958,117.119 144.958,119.024 v1(144.983,119.05) ; v1(187.376,124.511) 187.401,124.536 189.611,124.536 189.906,124.831 P4_U2.29@189.906,128.047
  Bottom Layer w0.381: v1@145.034,118.999 145.034,120.294 148.92,124.181 183.083,124.181 184.074,125.171 186.715,125.171 v1(187.376,124.511)
U_OUT_U1: C32_U1.2 Q2_U1.3 Q3_U1.2 R30_U1.2 U6_U1.6 U7_U1.1 U7_U1.2 | length 175.4
  Top Layer w0.508: U6_U1.6@33.122,97.942 33.122,95.733 34.112,94.742 34.112,91.669 33.528,91.084 33.528,90.272 33.528,89.281 34.823,87.986 C32_U1.2@35.001,87.986 35.001,87.224 33.757,85.979 33.757,81.915 33.325,81.483 R30_U1.2@33.325,80.67
  Top Layer w0.762: R30_U1.2@33.325,80.67 33.325,77.749 36,75.074 Q2_U1.3@36,74
  Top Layer w2.032: 28.245,46.025 Q3_U1.2@30.44,48.22 ; Q3_U1.2@30.44,50 Q3_U1.2@30.44,48.529 ; 30.582,44.958 30.44,45.1 Q3_U1.2@30.44,48.22 ; 33.02,45.949 Q3_U1.2@30.44,48.529 ; Q3_U1.2@30.44,48.22 Q3_U1.2@30.44,48.529
  Bottom Layer w2.032: Q2_U1.3@36,74 Q2_U1.3@36,73.389 ; 29.21,52.857 Q3_U1.2@30.44,51.627 ; 29.21,52.857 27.737,54.331 27.737,67.589 29.705,69.558 32.169,69.558 ; 29.21,52.857 29.21,62.586 ; 29.21,52.857 29.21,51.23 Q3_U1.2@30.44,50 ; 29.21,62.586 29.21,64.948 ; 29.21,62.586 33.122,66.497 33.122,68.859 ; 29.21,64.948 29.21,66.599 32.169,69.558 ; 29.21,64.948 33.122,68.859 ; Q3_U1.2@30.44,50 Q3_U1.2@30.44,51.627 ; Q3_U1.2@30.44,50 32.334,51.894 32.334,53.416 ; Q3_U1.2@30.44,51.627 30.44,61.022 34.519,65.1 34.519,69.774 36,71.255 ; 32.169,69.558 33.122,70.51 ; 32.334,53.416 32.334,55.143 ; 32.334,53.416 36,57.082 36,58.809 ; 32.334,55.143 32.334,57.658 ; 32.334,55.143 36,58.809 ; 32.334,57.658 32.334,60.325 36,63.991 ; 32.334,57.658 36,61.324 ; 33.122,68.859 33.122,70.51 ; 33.122,70.51 Q2_U1.3@36,73.389 ; 36,58.809 36,61.324 ; 36,61.324 36,63.991 ; 36,63.991 36,71.255 ; 36,71.255 Q2_U1.3@36,73.389
U_OUT_U2: C32_U2.2 Q2_U2.3 Q3_U2.2 R30_U2.2 U6_U2.6 U7_U2.1 U7_U2.2 | length 173.3
  Top Layer w0.508: R30_U2.2@193.218,77.927 193.218,83.083 194.843,84.709 C32_U2.2@194.843,85.344 ; U6_U2.6@194.005,96.52 194.005,93.853 194.005,89.51 193.7,89.205 193.7,86.995 C32_U2.2@194.97,85.725
  Top Layer w0.762: R30_U2.2@193.218,77.927 193.218,76.479 196.021,73.677 Q2_U2.3@196.021,72.898
  Top Layer w2.032: 187.884,45.085 Q3_U2.2@190.539,47.74 ; Q3_U2.2@190.539,48.931 Q3_U2.2@190.539,47.74 ; 190.551,44.526 190.539,44.538 Q3_U2.2@190.539,47.536 ; 191.795,43.51 191.999,43.713 191.999,46.076 Q3_U2.2@190.539,47.536 ; Q3_U2.2@190.539,47.536 Q3_U2.2@190.539,47.74
  Bottom Layer w2.032: 188.951,59.487 188.951,50.361 Q3_U2.2@190.481,48.83 ; 188.951,59.487 188.951,64.211 190.678,65.938 ; 188.951,59.487 190.678,61.214 190.678,65.938 ; Q3_U2.2@190.481,48.83 190.481,53.613 ; Q3_U2.2@190.481,48.83 190.714,48.83 191.618,49.733 191.618,53.035 ; 190.481,53.613 190.481,54.007 ; 190.481,53.613 191.555,54.686 191.618,54.686 ; 190.481,54.007 191.389,54.915 ; 190.481,54.007 190.481,55.822 ; 190.481,55.822 190.481,58.185 ; 190.481,55.822 191.389,54.915 ; 190.481,58.185 191.618,57.048 ; 190.481,58.185 190.481,58.351 191.973,59.842 ; 190.678,65.938 192.329,67.589 ; 191.389,54.915 191.618,55.143 ; 191.389,54.915 191.618,54.686 ; 191.618,53.035 191.618,54.686 ; 191.618,53.035 192.443,53.861 ; 191.618,54.686 191.618,55.143 ; 191.618,54.686 192.443,53.861 ; 191.618,55.143 191.618,57.048 ; 191.618,55.143 196.021,59.546 196.021,61.629 ; 191.618,57.048 191.973,57.404 191.973,57.582 ; 191.618,57.048 191.618,57.226 191.973,57.582 ; 191.973,57.582 196.021,61.629 ; 191.973,57.582 191.973,59.842 ; 191.973,59.842 192.329,60.198 ; 192.329,60.198 194.183,62.052 194.183,69.181 ; 192.329,60.198 192.329,67.589 ; 192.329,67.589 194.183,69.444 ; 192.443,53.861 196.901,58.318 196.901,72.018 Q2_U2.3@196.021,72.898 ; 194.183,69.181 194.183,69.444 ; 194.183,69.181 196.021,71.018 ; 194.183,69.444 194.183,71.06 Q2_U2.3@196.021,72.898 ; 196.021,61.629 196.021,71.018 ; 196.021,71.018 Q2_U2.3@196.021,72.898
UU_OUT1: U7_U1.3 U7_U1.4 U15.1 | length 452.1
  Top Layer w2.032: 31.42,41.173 31.801,41.173 33.376,39.599 ; 31.521,24.257 35.001,27.737 ; U7_U1.4@32.817,41.377 33.782,41.377 ; 33.376,40.361 33.376,39.599 ; 35.001,28.55 35.001,27.737 ; 35.001,33.706 35.001,30.861 ; 35.471,39.688 35.23,39.929 ; 39.802,14.783 39.751,14.783 ; 87.554,4.216 88.443,4.216 95.682,11.455 ; 89.103,7.468 93.091,11.455 ; U15.1@133.741,4.663 U15.1@133.741,5.248 ; 33.376,39.599 35.001,37.973 35.001,30.861 ; 33.782,41.377 35.23,39.929 ; 33.782,41.377 34.493,42.088 35.23,42.088 35.23,39.929 ; 35.001,27.737 35.001,15.443 38.989,11.455 93.091,11.455 ; 35.001,27.737 35.001,30.861 ; 35.23,39.929 36.754,38.405 ; 36.754,38.405 38.278,36.881 38.278,16.256 39.751,14.783 ; 36.754,38.405 36.754,16.053 40.869,11.938 93.574,11.938 ; 39.751,14.783 41.072,13.462 102.921,13.462 ; 93.091,11.455 95.682,11.455 ; 93.091,11.455 93.574,11.938 ; 93.574,11.938 96.164,11.938 ; 95.682,11.455 103.226,11.455 105.41,9.271 ; 95.682,11.455 96.164,11.938 ; 96.164,11.938 104.445,11.938 ; 102.921,13.462 104.318,13.462 ; 102.921,13.462 104.445,11.938 ; 104.318,13.462 129.184,13.462 133.741,8.905 133.741,7.051 ; 104.318,13.462 106.172,11.608 ; 104.445,11.938 105.918,10.465 106.604,10.465 ; 105.41,9.271 129.718,9.271 ; 105.41,9.271 106.604,10.465 ; 106.172,11.608 107.315,10.465 ; 106.172,11.608 129.184,11.608 130.327,10.465 ; 106.604,10.465 107.315,10.465 ; 107.315,10.465 128.524,10.465 ; 128.524,10.465 129.718,9.271 ; 128.524,10.465 130.327,10.465 ; 129.718,9.271 U15.1@133.741,5.248 ; 129.718,9.271 131.521,9.271 ; 130.327,10.465 131.521,9.271 ; 131.521,9.271 133.741,7.051 ; U15.1@133.741,5.248 133.741,7.051
UU_OUT2: U7_U2.3 U7_U2.4 U15.4 | length 201.7
  Top Layer w2.032: U15.4@149.341,4.663 U15.4@149.341,5.349 ; 187.198,40.945 184.582,40.945 183.007,39.37 183.007,36.373 179.375,32.741 153.086,32.741 148.209,27.864 148.209,6.782 U15.4@149.341,5.65 ; U15.4@149.341,5.349 U15.4@149.341,5.65 ; U15.4@149.341,5.349 150.52,6.528 150.52,26.06 154.711,30.251 181.356,30.251 185.471,34.366 185.471,37.262 187.655,39.446 185.598,39.446 184.328,38.176 184.328,35.763 179.959,31.394 153.67,31.394 149.341,27.066 U15.4@149.341,5.65
V_OUT_U1: C47_U1.1 Q4_U1.3 Q5_U1.2 R47_U1.1 U9_U1.6 U10_U1.1 U10_U1.2 | length 161
  Top Layer w0.762: U9_U1.6@54.127,97.942 54.102,97.917 54.102,96.241 54.686,95.656 54.686,89.687 56.032,88.341 C47_U1.1@56.032,88.214 56.032,81.763 55.677,81.407 R47_U1.1@55.677,80.797 55.677,76.937 57,75.613 Q4_U1.3@57,74
  Top Layer w2.032: 53.188,45.974 Q5_U1.2@55.44,48.226 ; 55.423,45.72 55.44,45.737 55.44,48.141 ; Q5_U1.2@55.44,50 Q5_U1.2@55.44,48.226 ; 57.582,45.999 55.44,48.141 ; 55.44,48.141 Q5_U1.2@55.44,48.226
  Bottom Layer w2.032: 53.162,69.088 56.769,72.695 Q4_U1.3@56.769,73.558 ; 55.44,57.209 Q5_U1.2@55.44,51.265 ; 51.74,54.966 50.368,56.337 50.368,67.335 52.121,69.088 53.772,69.088 ; 51.74,54.966 54.026,52.68 ; 51.74,54.966 51.74,67.056 53.772,69.088 ; 53.772,69.088 54.026,69.342 ; 53.772,69.088 54.026,69.088 ; 54.026,52.68 54.026,69.088 ; 54.026,52.68 54.026,50.19 55.25,50.19 Q5_U1.2@55.44,50 ; 54.026,52.68 Q5_U1.2@55.44,51.265 ; 54.026,69.088 54.026,69.342 ; 54.026,69.088 55.27,69.088 ; 54.026,69.342 55.27,70.587 ; 55.27,69.088 55.27,70.587 ; 55.27,69.088 55.27,59.233 56.769,57.734 ; 55.27,70.587 56.769,72.085 ; Q5_U1.2@55.44,50 Q5_U1.2@55.44,51.265 ; Q5_U1.2@55.44,50 56.477,50 56.769,50.292 56.769,57.734 ; 56.769,57.734 56.769,65.253 ; 56.769,65.253 56.769,72.085 ; 56.769,65.253 57,65.484 Q4_U1.3@57,72.316 ; 56.769,72.085 Q4_U1.3@56.769,73.558 ; 56.769,72.085 Q4_U1.3@57,72.316 ; Q4_U1.3@56.769,73.558 56.769,73.769 57,74 Q4_U1.3@57,73.789 ; Q4_U1.3@56.769,73.558 Q4_U1.3@57,73.789 ; Q4_U1.3@57,72.316 Q4_U1.3@57,73.789
V_OUT_U2: C47_U2.1 Q4_U2.3 Q5_U2.2 R47_U2.1 U9_U2.6 U10_U2.1 U10_U2.2 | length 157.8
  Top Layer w0.508: U9_U2.6@213.589,96.52 213.589,95.174 214.808,93.955 214.808,90.119 214.427,89.738 ; R47_U2.1@213.665,77.521 213.665,82.474 215.824,84.633 C47_U2.1@215.824,85.852 214.427,87.249 214.427,89.738 ; 214.427,89.764 214.427,89.738
  Top Layer w0.762: R47_U2.1@213.665,77.521 213.665,76.556 217.026,73.194 Q4_U2.3@217.026,72.822
  Top Layer w2.032: 212.827,44.983 Q5_U2.2@215.481,47.638 ; Q5_U2.2@215.481,48.83 Q5_U2.2@215.481,47.638 ; 215.494,44.425 215.481,44.437 Q5_U2.2@215.481,47.434 ; 216.738,43.409 216.941,43.612 216.941,45.974 Q5_U2.2@215.481,47.434 ; Q5_U2.2@215.481,47.434 Q5_U2.2@215.481,47.638
  Bottom Layer w2.032: 212.471,53.81 213.328,52.953 ; 212.471,53.81 211.48,54.8 211.48,65.608 213.328,67.456 ; 212.471,53.81 213.328,53.81 ; 213.328,52.953 214.579,51.702 214.579,49.047 214.797,48.83 Q5_U2.2@215.481,48.83 ; 213.328,52.953 213.328,53.81 ; 213.328,53.81 213.728,53.81 215.214,52.324 ; 213.328,53.81 213.328,67.456 ; 213.328,67.456 215.214,69.342 ; 215.214,52.324 215.214,69.342 ; 215.214,52.324 215.481,52.057 Q5_U2.2@215.481,48.83 ; 215.214,69.342 215.214,71.01 Q4_U2.3@217.026,72.822 ; Q5_U2.2@215.481,48.83 216.753,48.83 216.865,48.717 216.865,52.121 ; 216.865,52.121 216.865,53.492 ; 216.865,52.121 217.856,53.111 217.856,55.55 ; 216.865,53.492 215.278,55.08 217.026,56.829 Q4_U2.3@217.026,72.822 ; 216.865,53.492 216.865,54.559 217.856,55.55 ; Q4_U2.3@217.026,72.822 217.856,71.992 217.856,55.55
VAL_CTRL_U1: P4_U1.7
VAL_CTRL_U2: P4_U2.7
VDC1_U1: P4_U1.14 R83_U1.2 U13_U1.7 | length 44.1
  Top Layer w0.508: P4_U1.14@69.139,128.047 69.139,124.13 69.545,123.723 80.035,123.723 80.315,123.444 v1(80.315,122.022) 80.62,122.022 82.309,120.332 82.309,118.402 82.931,117.78 95.326,117.78 95.783,117.323 95.783,114.605 95.174,113.995 U13_U1.7@93.904,113.995 ; R83_U1.2@78.791,119.507 v1(80.239,119.507)
  Bottom Layer w0.508: v1@80.315,119.507 v1@80.315,121.971
VDC1_U2: P4_U2.14 R83_U2.2 U13_U2.7 | length 83.5
  Top Layer w0.381: P4_U2.14@190.858,129.952 190.858,126.286 194.462,122.682 v1(194.589,122.682) ; v1(253.035,100.609) 253.06,100.609 255.295,98.374 U13_U2.7@255.295,97.815
  Top Layer w0.762: U13_U2.7@255.295,97.815 255.295,96.19 256.235,95.25 R83_U2.2@256.235,94.92
  Bottom Layer w0.381: v1(194.589,122.682) 202.565,122.682 204.851,120.396 223.926,120.396 237.084,107.239 243.408,107.239 250.038,100.609 v1(253.035,100.609)
VREF_2V5_U1: C2_U1.1 C3_U1.1 R3_U1.1 R4_U1.1 U2_U1.2 | length 27.9
  Top Layer w1.016: U2_U1.2@8.89,49.276 8.89,47.574 9.728,46.736 v1(9.728,46.787) 10.109,46.406 C3_U1.1@16.104,46.406 ; v1(10.998,60.452) R3_U1.1@12.573,60.452
  Top Layer w1.27: R3_U1.1@12.7,60.325 R4_U1.1@14.757,60.325
  Bottom Layer w1.016: v1(9.728,46.787) 9.728,48.819 10.77,49.86 ; 10.795,49.86 11.684,50.749 11.684,52.014 11.697,52.026 11.697,55.131 10.998,55.829 v1(10.998,60.452)
VREF_2V5_U2: C2_U2.1 C3_U2.1 R3_U2.1 R4_U2.1 U2_U2.2 | length 31.6
  Top Layer w0.762: v1(131.953,99.72) 131.953,101.422 C3_U2.1@132.004,101.473 ; R4_U2.1@145.72,102.438 v1(146.939,102.438) 147.726,103.226 R3_U2.1@147.726,104.8
  Top Layer w1.27: C3_U2.1@132.004,101.473 131.623,101.854 131.623,108.153 132.309,108.839 U2_U2.2@134.264,108.839
  Bottom Layer w0.762: v1(131.953,99.72) 136.55,99.72 138.659,101.829 142.291,101.829 142.9,102.438 v1(146.939,102.438)
VV_OUT1: U10_U1.3 U10_U1.4 U15.2 | length 359.8
  Top Layer w2.032: 57.556,41.758 57.836,41.758 ; 58.115,40.005 59.766,38.354 59.766,23.216 65.1,17.882 131.267,17.882 132.207,16.942 ; 73.711,23.749 77.597,19.863 ; 81.636,19.863 77.597,19.863 ; 127.584,18.923 127.127,18.466 66.37,18.466 61.214,23.622 61.214,33.63 61.214,38.379 ; 135.179,16.586 138.941,12.824 ; 57.836,41.758 60.122,39.472 ; 57.836,41.758 59.893,41.758 60.122,41.529 60.122,39.472 ; 60.122,39.472 61.214,38.379 ; 61.214,38.379 62.586,37.008 62.586,32.258 62.586,24.562 64.732,22.415 67.285,19.863 77.597,19.863 ; 77.597,19.863 131.877,19.863 138.941,12.798 138.941,11.503 ; 132.207,16.942 137.986,11.163 ; 132.207,16.942 133.502,16.942 138.941,11.503 ; 137.986,11.163 138.941,10.208 ; 137.986,11.163 137.986,5.619 138.941,4.663 138.941,10.208 ; 138.941,10.208 138.941,11.503
  Top Layer w2.54: 61.214,34.925 61.214,33.63 62.586,32.258 64.732,30.112 ; 64.732,22.415 64.732,30.112 ; 67.107,22.504 66.37,23.241 66.37,28.423 ; 71.831,22.962 66.37,28.423 ; 64.732,30.112 66.37,28.473 66.37,28.423
VV_OUT2: U10_U2.3 U10_U2.4 U15.5 | length 318.1
  Top Layer w2.032: 211.557,39.268 207.696,39.268 205.207,36.779 205.207,30.175 199.974,24.943 199.492,24.943 ; 212.192,40.869 206.807,40.869 203.454,37.516 ; 213.157,39.141 211.988,37.973 ; 154.541,10.422 155.207,11.087 ; 154.541,10.422 154.541,4.663 155.207,5.328 155.207,11.087 ; 154.541,10.422 154.541,12.631 161.569,19.66 ; 155.207,11.087 166.116,21.996 ; 161.569,19.66 164.922,23.012 167.132,23.012 ; 161.569,19.66 161.569,22.2 164.313,24.943 184.887,24.943 186.334,23.495 ; 166.116,21.996 168.148,21.996 ; 166.116,21.996 167.132,23.012 ; 167.132,23.012 168.148,21.996 ; 167.132,23.012 167.615,23.495 186.334,23.495 ; 168.148,21.996 196.545,21.996 ; 186.334,23.495 194.361,23.495 ; 194.361,23.495 196.063,23.495 197.51,24.943 ; 194.361,23.495 197.091,26.226 ; 196.545,21.996 199.492,24.943 ; 196.545,21.996 198.628,21.996 ; 197.091,26.226 197.091,31.153 198.285,32.347 ; 197.091,26.226 198.285,27.419 ; 197.51,24.943 203.454,30.886 203.454,37.516 ; 197.51,24.943 199.492,24.943 ; 198.285,27.419 198.285,32.347 ; 198.285,27.419 199.936,29.07 ; 198.285,32.347 199.936,33.998 ; 198.628,21.996 207.01,30.378 ; 198.628,21.996 201.371,21.996 ; 199.936,29.07 199.936,33.998 ; 199.936,29.07 201.778,30.912 201.778,35.839 ; 199.936,33.998 201.778,35.839 ; 201.371,21.996 207.01,27.635 ; 201.371,21.996 203.479,21.996 ; 201.778,35.839 203.454,37.516 ; 203.479,21.996 205.969,21.996 209.499,25.527 209.499,28.016 ; 203.479,21.996 207.01,25.527 ; 207.01,25.527 207.01,27.635 ; 207.01,25.527 207.835,26.352 ; 207.01,27.635 207.01,30.378 ; 207.01,30.378 207.01,35.789 207.835,36.614 ; 207.835,26.352 207.835,36.614 ; 207.835,26.352 209.499,28.016 ; 207.835,36.614 209.194,37.973 211.988,37.973 ; 209.499,28.016 209.499,35.484 211.988,37.973
W_OUT_U1: C54_U1.1 Q7_U1.3 Q8_U1.2 R62_U1.1 U11_U1.6 U12_U1.1 U12_U1.2 | length 160.3
  Top Layer w0.508: U11_U1.6@73.838,97.968 73.838,97.104 75.59,95.352 75.59,88.951 76.505,88.036 76.606,88.036 C54_U1.1@76.937,88.036
  Top Layer w0.762: C54_U1.1@76.606,88.036 76.606,86.131 76.073,85.598 R62_U1.1@76.073,80.035 76.073,78.384 78,76.457 Q7_U1.3@78,74
  Top Layer w2.032: 70.46,46.482 Q8_U1.2@72.44,48.462 ; 72.263,45.009 72.44,45.186 Q8_U1.2@72.44,48.462 ; Q8_U1.2@72.44,50 Q8_U1.2@72.44,48.464 ; 74.968,45.936 Q8_U1.2@72.44,48.464 ; Q8_U1.2@72.44,48.462 Q8_U1.2@72.44,48.464
  Bottom Layer w2.032: 72.44,56.287 72.44,63.169 ; 69.393,54.407 68.097,55.702 68.097,58.242 69.393,59.538 ; 69.393,54.407 70.65,53.149 ; 69.393,54.407 69.393,57.201 ; 69.393,57.201 69.393,59.538 ; 69.393,57.201 70.65,55.944 ; 69.393,59.538 69.393,64.846 ; 69.393,64.846 69.393,67.234 70.891,68.732 73.279,68.732 ; 69.393,64.846 70.79,66.243 ; 70.65,53.149 71.044,52.756 71.044,51.396 72.44,50 Q8_U1.2@72.44,50.342 ; 70.65,53.149 70.65,55.639 ; 70.65,55.639 70.65,55.944 ; 70.65,55.639 72.44,53.849 ; 70.65,55.944 70.79,56.083 70.79,66.243 ; 70.79,66.243 73.279,68.732 ; Q8_U1.2@72.44,50.342 72.44,53.849 ; Q8_U1.2@72.44,50.342 74.041,51.943 74.041,54.331 72.44,55.932 72.44,53.849 ; 72.44,63.169 75.908,66.637 ; 72.44,63.169 72.44,65.938 75.032,68.529 ; 73.279,68.732 76.454,71.907 ; 73.279,68.732 74.828,68.732 75.032,68.529 ; 75.032,68.529 76.454,69.952 76.454,71.907 ; 75.908,66.637 78,68.729 Q7_U1.3@78,73.965 ; 75.908,66.637 77.203,66.637 79.959,69.393 79.959,72.041 ; 76.454,71.907 76.454,72.454 ; 76.454,72.454 Q7_U1.3@77.965,73.965 ; 76.454,72.454 76.454,73.939 76.733,74.219 76.987,73.965 Q7_U1.3@77.965,73.965 ; Q7_U1.3@77.965,73.965 Q7_U1.3@78,73.965 ; Q7_U1.3@77.965,73.965 Q7_U1.3@78,74 ; Q7_U1.3@78,73.965 Q7_U1.3@78,74 ; Q7_U1.3@78,73.965 Q7_U1.3@78.038,73.965 ; Q7_U1.3@78,74 Q7_U1.3@78.038,73.965 ; Q7_U1.3@78.038,73.965 Q7_U1.3@78.038,73.965 79.451,73.965 79.629,74.143 79.959,73.812 79.959,72.041 ; Q7_U1.3@78.038,73.965 79.959,72.041
W_OUT_U2: C54_U2.1 Q7_U2.3 Q8_U2.2 R62_U2.1 U11_U2.6 U12_U2.1 U12_U2.2 | length 152.4
  Top Layer w0.508: U11_U2.6@233.858,96.495 233.858,95.631 235.585,93.904 235.585,88.697 235.585,86.309 236.068,85.827 C54_U2.1@237.134,85.827 237.134,79.045 R62_U2.1@236.779,78.689
  Top Layer w0.762: R62_U2.1@236.779,78.689 236.779,75.59 238.032,74.337 Q7_U2.3@238.032,72.771
  Top Layer w2.032: 229.489,43.409 229.464,43.434 229.464,44.475 229.997,44.475 232.481,46.96 ; 232.481,43.663 232.481,46.919 ; Q8_U2.2@232.481,48.83 232.481,46.96 ; 234.061,43.536 234.061,45.339 232.481,46.919 ; 232.481,46.919 232.481,46.96
  Bottom Layer w2.032: 234.315,56.896 234.315,55.499 ; 231.115,57.404 231.115,59.639 ; 231.115,57.404 231.115,48.895 231.18,48.83 Q8_U2.2@232.481,48.83 ; 231.115,57.404 233.223,59.512 233.223,66.599 ; 231.115,59.639 231.115,64.491 231.851,65.227 ; 231.115,59.639 231.851,60.376 231.851,65.227 ; 231.851,65.227 233.223,66.599 ; Q8_U2.2@232.481,48.83 232.481,56.332 235.052,58.903 235.052,68.428 ; Q8_U2.2@232.481,48.83 232.492,48.819 233.832,48.819 234.315,49.301 234.315,52.883 ; 233.223,66.599 235.052,68.428 ; 234.315,52.883 234.315,55.499 ; 234.315,52.883 238.506,57.074 238.506,72.297 Q7_U2.3@238.032,72.771 236.652,71.391 236.652,70.028 ; 234.315,55.499 236.652,57.836 236.652,70.028 ; 235.052,68.428 236.652,70.028